# EAGLE board openmv-ble (EAGLE 6.1)
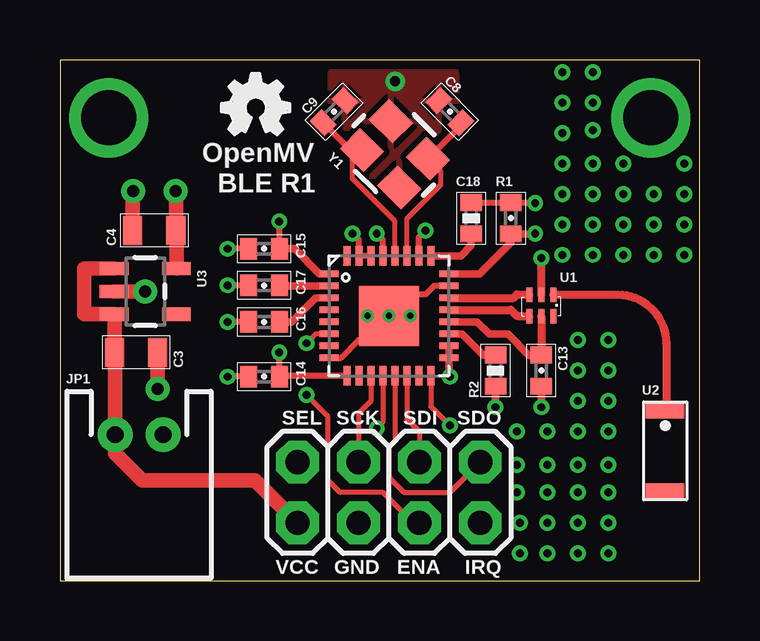
[diagram p0: board, top side]
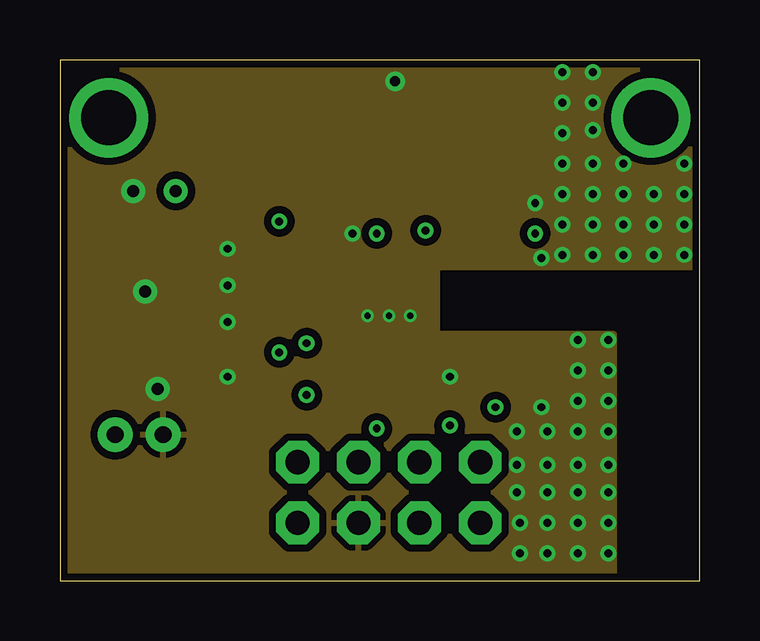
[diagram p1: board, inner layer Route2]
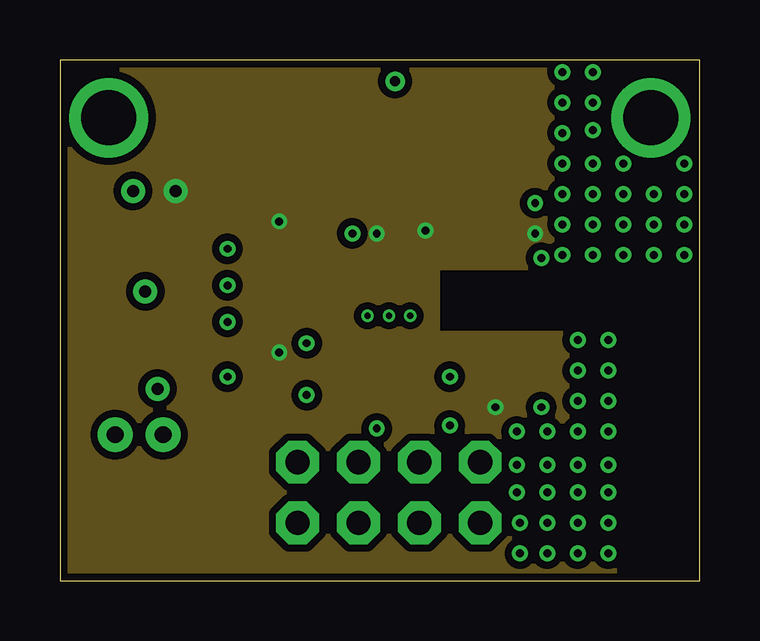
[diagram p2: board, inner layer Route15]
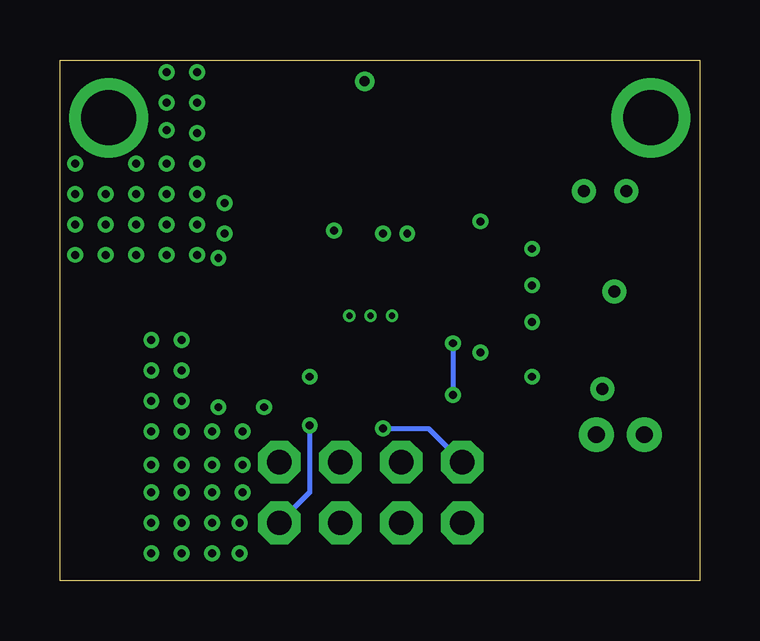
[diagram p3: board, bottom side, seen from below]

Size 26.67 x 21.72 mm. Coordinates in mm from the lower left corner, seen from the top.
Outline: 0,0 26.67,0 26.67,21.72 0,21.72 0,0
Copper layers (1*2+15*16): Top 0.035mm / dielectric 1.5mm / Route2 0.035mm / dielectric 0.15mm / Route15 0.035mm / dielectric 0.2mm / Bottom 0.035mm
Design rules: minimum track width 8mil, minimum drill 10mil, track to track 6mil, track to pad 6mil, pad to pad 6mil, via to via 6mil, smd to smd 6mil, copper to edge 5mil, drill to drill 10mil, minimum pad ring 10mil, minimum via ring 4mil, stop-mask expansion 3mil, vias tented up to drill 20mil, thermal gap 10mil
Net classes: 1 vcc: width 1.016 mm, clearance 0.203 mm; 2 antenna: width 0.363 mm, clearance 0.305 mm; 3 1.8v: width 0.457 mm, clearance 0.254 mm

## Footprints (pad centres in the part's own frame; a part is rotated, then mirrored left to right if it is on the bottom)
0805 = smd 0.8 x 1.2: 1 -0.9,0; 2 0.9,0
0402-CAP = smd 0.7 x 0.9: 1 -0.65,0; 2 0.65,0
JST-2-PTH = drill 0.7 pad 1.448: 1 -1,0; 2 1,0
0402-RES = smd 0.7 x 0.9: 1 -0.65,0; 2 0.65,0
2450BM14A0002 = smd 0.25 x 0.6: P$1 0.5,0.5; P$2 0,0.5; P$3 -0.5,0.5; P$4 -0.5,-0.4; P$5 0,-0.4; P$6 0.5,-0.4
ANTENNA = smd 1.6 x 0.6: P$1 0.8,0.3; P$2 0.8,3.6
SOT23-5 = smd 0.55 x 1.2: 1 -0.95,-1.3; 2 0,-1.3; 3 0.95,-1.3; 4 0.95,1.3; 5 -0.95,1.3
OPENMV-SMALL = drill 1.016 pad 1.778 octagon: 1 17.526,4.953; 2 17.526,2.413; 3 14.986,4.953; 4 14.986,2.413; 5 12.446,4.953; 6 12.446,2.413; 7 9.906,4.953; 8 9.906,2.413 | drill 2.286: P$1 2.032,19.304; P$2 24.638,19.304
QFN-32 = smd 0.285 x 0.8: P$1 -1.75,-2.5; P$2 -1.25,-2.5; P$3 -0.75,-2.5; P$4 -0.25,-2.5; P$5 0.25,-2.5; P$6 0.75,-2.5; P$7 1.25,-2.5; P$8 1.75,-2.5; P$17 1.75,2.5; P$18 1.25,2.5; P$19 0.75,2.5; P$20 0.25,2.5; P$21 -0.25,2.5; P$22 -0.75,2.5; P$23 -1.25,2.5; P$24 -1.75,2.5 | smd 0.8 x 0.285: P$9 2.5,-1.75; P$10 2.5,-1.25; P$11 2.5,-0.75; P$12 2.5,-0.25; P$13 2.5,0.25; P$14 2.5,0.75; P$15 2.5,1.25; P$16 2.5,1.75; P$25 -2.5,1.75; P$26 -2.5,1.25; P$27 -2.5,0.75; P$28 -2.5,0.25; P$29 -2.5,-0.25; P$30 -2.5,-0.75; P$31 -2.5,-1.25; P$32 -2.5,-1.75 | smd 2.5 x 2.5: P$33 0,0
CRYSTAL3.2X2.5 = smd 1.4 x 1.2: 1 -1.1,-0.85; 2 1.1,-0.85; 3 1.1,0.85; 4 -1.1,0.85

## Placement (x,y rotation side)
C3  10uF  [0805]  3.17,9.53 0 top
C4  10uF  [0805]  3.94,14.61 180 top
C8  22pF  [0402-CAP]  16.26,19.56 135 top
C9  22pF  [0402-CAP]  11.43,19.56 45 top
C13  2.2nF  [0402-CAP]  20.07,8.76 270 top
C14  0.1uF  [0402-CAP]  8.51,8.51 180 top
C15  0.1uF  [0402-CAP]  8.51,13.84 180 top
C16  0.1uF  [0402-CAP]  8.51,10.79 180 top
C17  0.33uF  [0402-CAP]  8.51,12.32 180 top
C18  0.01uF  [0402-CAP]  18.8,15.11 90 top
JP1  JP3  [JST-2-PTH]  3.3,6.1 180 top
LOGO1  OSHW_LOGO_FILLX0100-NT  [OSHW_FILLX100_NOTEXT]  6.74,18.61 0 top
R1  22k  [0402-RES]  17.14,15.11 270 top
R2  10k  [0402-RES]  18.16,8.76 90 top
U1  2450BM14A0002  [2450BM14A0002]  20.07,11.43 0 top
U2  ANT-YAGEO  [ANTENNA]  26.04,7.37 180 top
U3  2.8V  [SOT23-5]  3.56,12.06 270 top
U5  OPENMVSMALL  [OPENMV-SMALL]  0,0 0 top
U$2  NRF8001  [QFN-32]  13.72,11.05 270 top
Y1  16Mhz  [CRYSTAL3.2X2.5]  13.97,17.78 135 top

## Library data of the parts
C3 C4 C8 C9 C13-C18 JP1 R1 R2 = sfe
LOGO1 U1 U$2 = iofault
U2 = CC3000
U3 = SparkFun
U5 = openmv
Y1 = mux

## Nets
ACTIVE: U5.4 U$2.P$6
DCC: U$2.P$32
GND: C3.2 C4.2 C8.2 C9.2 C13.2 C14.2 C15.2 C16.2 C17.2 C18.2 JP1.1 R1.1 U1.P$2 U3.2 U5.6 U$2.P$8 U$2.P$17 U$2.P$18 U$2.P$23 U$2.P$30 U$2.P$31 U$2.P$33 Y1.2 Y1.4
MISO: U5.3 U$2.P$14
MOSI: U5.1 U$2.P$13
N$1: U$2.P$7
N$2: C9.1 U$2.P$28 Y1.3
N$3: U$2.P$10
N$7: C8.1 U$2.P$27 Y1.1
N$8: U1.P$3 U$2.P$22
N$10: U1.P$1 U2.P$1
N$11: U1.P$4 U$2.P$21
N$12: C13.1 U1.P$5 U$2.P$20
N$18: C17.1 U$2.P$2
N$19: C16.1 U$2.P$3
N$20: R1.2 U$2.P$25
N$21: R2.2 U$2.P$19
RDY: U5.2 U$2.P$16
REQ: U5.7 U$2.P$12
SCLK: U5.5 U$2.P$11
VCC: C4.1 C14.1 C15.1 C18.1 R2.1 U3.5 U$2.P$1 U$2.P$9 U$2.P$24 U$2.P$26 U$2.P$29
VIN: C3.1 JP1.2 U3.1 U3.3 U5.8

## Tracks (layer width: path | path; a pad name or v marks a point on that pad's centre or on a via)
ACTIVE  (via drill 0.33)
  Top 0.203: U$2.P$6 10.68,10.3 v10.29,9.91 | U5.4 14.73,2.41 13.46,3.68 11.68,3.68 11.18,4.19 11.18,6.86 v10.29,7.75
  Bottom 0.203: v10.29,9.91 v10.29,7.75
GND  (via drill 0.25, 0.33, 0.41, 0.5)
  Top 0.254: C14.2 v6.99,8.51 | C17.2 v6.99,12.32 | C16.2 v6.99,10.79 | C15.2 v6.99,13.84 | v12.19,14.48 12.47,14.2 U$2.P$31 U$2.P$30 | v12.83,11.05 12.83,10.16 12.7,10.16 12.57,10.03 12.45,10.03 11.71,9.3 U$2.P$8 | v14.61,11.05 14.61,11.94 15.24,11.94 15.6,12.3 U$2.P$23 | v19.81,15.75 19.8,15.76 C18.2 R1.1
  Top 0.305: C13.2 v20.07,7.24 | U$2.P$17 U$2.P$18 16.22,8.55 v16.26,8.51
  Top 0.33: U1.P$2 v20.07,13.46
  Top 0.61: U3.2 v3.56,12.06 | C3.2 4.08,8.01 v4.06,8 | C4.2 3.04,16.25 v3.05,16.26
  other vias: 13.72,11.05 13.97,20.83 26.04,13.59 24.77,13.59 23.5,13.59 22.23,13.59 20.95,13.59 26.04,14.86 24.77,14.86 23.5,14.86 22.23,14.86 20.95,14.86 26.04,16.13 26.04,17.4 24.77,16.13 23.5,16.13 22.23,16.13 20.95,16.13 22.86,10.03 21.59,10.03 22.86,8.76 22.86,7.49 22.86,6.22 22.86,4.83 22.86,3.68 22.86,2.41 22.86,1.14 21.59,1.14 20.32,1.14 19.18,1.14 21.59,8.76 21.59,7.49 21.59,6.22 21.59,4.83 21.59,3.68 21.59,2.41 20.32,2.41 20.32,3.68 20.32,4.83 20.32,6.22 19.05,6.22 19.05,4.83 19.05,3.68 19.18,2.41 23.5,17.4 22.23,17.4 20.95,17.4 20.95,18.67 20.95,19.94 20.95,21.21 22.23,21.21 22.23,19.94 22.23,18.8
  pour Route2 (isolate 0.305): 0,0 23.11,0 23.11,10.29 15.75,10.29 15.75,13.08 26.67,13.08 26.67,21.72 0,21.72
  pour Top (isolate 0.254): 16.51,21.21 16.51,16.76 11.3,16.89 11.3,21.21
MISO
  Top 0.203: U$2.P$14 14.47,6.74 14.99,6.22 U5.3
MOSI
  Top 0.203: U$2.P$13 13.97,5.84 13.72,5.59 13.72,4.32 14.35,3.68 16.26,3.68 U5.1
N$2
  Top 0.203: U$2.P$28 13.97,14.99 12.19,16.76 12.19,17.56 Y1.3
  Top 0.254: C9.1 12.11,17.96 Y1.3
N$7
  Top 0.203: U$2.P$27 14.47,15.1 15.88,16.51 15.88,17.08 Y1.1
  Top 0.254: C8.1 16.72,18.97 Y1.1
N$8
  Top 0.33: U$2.P$22 18.91,11.8 19.05,11.94 19.56,11.94 U1.P$3
N$10
  Top 0.33: U1.P$1 23.25,11.93 arc-90 25.27,9.91 25.27,7.1 U2.P$1
N$11
  Top 0.33: U$2.P$21 18.8,11.3 19.05,11.05 19.55,11.05 U1.P$4
N$12
  Top 0.305: U$2.P$20 17.39,10.8 17.91,10.29 18.67,10.29 19.56,9.4 20.05,9.4 C13.1
  Top 0.33: U1.P$5 C13.1
N$18
  Top 0.305: U$2.P$2 9.18,12.3 C17.1
N$19
  Top 0.305: U$2.P$3 10.66,11.8 9.65,10.79 C16.1
N$20
  Top 0.305: U$2.P$25 16.72,13.55 17.14,13.97 R1.2
N$21
  Top 0.305: U$2.P$19 16.75,10.3 17.64,9.41 R2.2
RDY  (via drill 0.33)
  Top 0.203: U$2.P$16 15.47,7.27 v16.26,6.48
  Bottom 0.203: v16.26,6.48 16.26,3.68 U5.2
REQ  (via drill 0.33)
  Top 0.203: U$2.P$12 13.47,6.61 v13.21,6.35
  Bottom 0.203: v13.21,6.35 11.3,6.35 U5.7
SCLK
  Top 0.203: U$2.P$11 12.97,7.5 12.45,6.99 U5.5
VCC  (via drill 0.33, 0.5)
  Top 0.254: U$2.P$29 13.47,14.22 v13.21,14.48 | U$2.P$26 14.97,14.33 v15.24,14.61 | v9.14,9.53 9.16,9.51 C14.1 9.2,8.55 U$2.P$9 | C15.1 9.16,14.97 v9.14,14.99
  Top 0.305: R2.1 v18.16,7.24 | U$2.P$24 17.5,12.8 18.8,14.1 C18.1 19.8,14.46 v19.81,14.48 | U$2.P$1 10.82,12.8 9.78,13.84 C15.1
  Top 0.61: U3.5 4.86,14.59 C4.1 4.84,16.25 v4.83,16.26
  pour Route15 (isolate 0.305): 0,0 23.11,0 23.11,10.29 15.75,10.29 15.75,13.08 26.67,13.08 26.67,21.72 0,21.72
VIN
  Top 0.61: C3.1 2.27,10.03 | 2.27,10.03 2.27,11.1 U3.3 1.02,11.12 1.02,13.02 U3.1 | 2.27,10.03 2.3,10.01 JP1.2 2.3,5.32 3.43,4.19 8.13,4.19 U5.8

## Text on the board
tPlace: OpenMV | BLE R1 | SEL | SCK | SDI | SDO | VCC | GND | ENA | IRQ
Document: Antenna trace 12mils (50Ohms impedance) | Stackup: | 1 oz copper | 6.7 mil prepreg | 0.5 oz copper | 47 mil core | 0.5 oz copper | 6.7 mil prepreg | 1 oz copper | er is 3.66